# Altium PCB AC_board.PcbDoc (part 4 of 4)
Units mil, origin at the board's own origin, x right, y up, seen from the top; angles counter-clockwise.
Board outline 6299.21 x 4130.86 mil, 4 copper layers (Top Layer, Layer 1, Layer 2, Bottom Layer), stack 31.891 mil thick; 48 components, 40 nets, 187 pads, 6431 vias.
Unrouted connection lines stored in the file: 10.
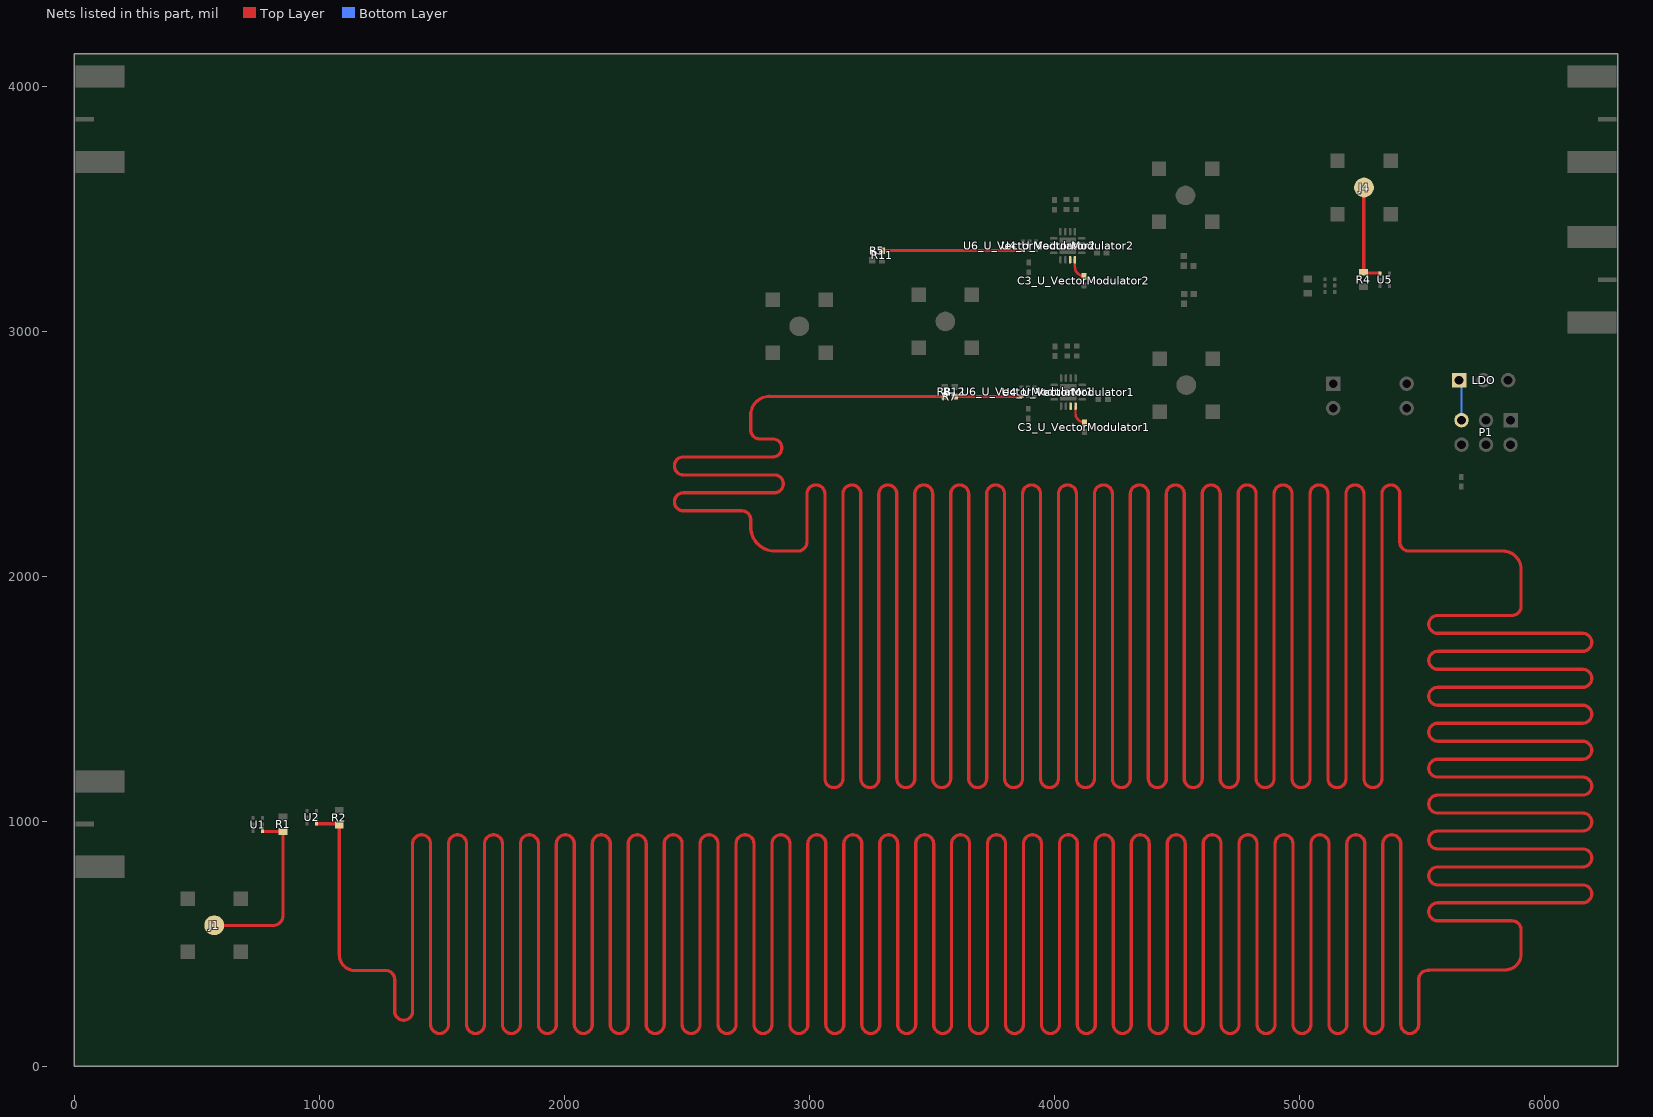
[diagram p6: the nets of this part, all layers, seen from the top]

## Via types
v1: diameter 12/12/12/12 (per signal layer), hole 10, Top Layer to Bottom Layer, 5510 vias
v2: diameter 14/14/14/14 (per signal layer), hole 12, Top Layer to Bottom Layer, 919 vias
v3: diameter 15/15/15/15 (per signal layer), hole 12, Top Layer to Bottom Layer, 2 vias

## Nets (pads, with @x,y where several pads share a name; then routed paths per layer and width w, separated by ;. In a path a pad name is that pad's centre, name@x,y a point inside that pad or via, vN(x,y) a via of type N, cw(c..) or ccw(c..) an arc to the next point about the centre after c; other vN are vias at no path point) (continued)
RF-S2-2: R2.2 R7.1 R8.1 U2.4 | length 107038.5
  Top Layer w0: R8.1@3548.49,2731.18 R8.1@3552.31,2735 ; R8.1@3549.18,2739.13 3552.5,2735.81 R8.1@3553,2735.32
  Top Layer w13.3: U2.4@989.88,992.92 1072.55,992.92 1082.29,983.18 1082.29,458.41 ccw(c1148.13,458.41) 1134.48,394 1135.96,394 1142.61,394 1271.4,394 cw(c1271.4,357.35) 1308.05,357.35 1308.05,227.31 ccw(c1344.7,227.31) 1381.36,227.31 1381.36,910.73 cw(c1418.01,910.73) 1454.66,910.73 1454.66,173.54 ccw(c1491.31,173.54) 1527.97,173.54 1527.97,910.73 cw(c1564.62,910.73) 1601.27,910.73 1601.27,173.54 ccw(c1637.92,173.54) 1674.58,173.54 1674.58,910.73 cw(c1711.23,910.73) 1747.88,910.73 1747.88,173.54 ccw(c1784.53,173.54) 1821.19,173.54 1821.19,910.73 cw(c1857.84,910.73) 1894.49,910.73 1894.49,173.54 ccw(c1931.14,173.54) 1967.8,173.54 1967.8,910.73 cw(c2004.45,910.73) 2041.1,910.73 2041.1,173.54 ccw(c2077.75,173.54) 2114.41,173.54 2114.41,910.73 cw(c2151.06,910.73) 2187.71,910.73 2187.71,173.54 ccw(c2224.36,173.54) 2261.02,173.54 2261.02,910.73 cw(c2297.67,910.73) 2334.32,910.73 2334.32,173.54 ccw(c2370.97,173.54) 2407.63,173.54 2407.63,910.73 cw(c2444.28,910.73) 2480.93,910.73 2480.93,173.54 ccw(c2517.58,173.54) 2554.24,173.54 2554.24,910.73 cw(c2590.89,910.73) 2627.54,910.73 2627.54,173.54 ccw(c2664.19,173.54) 2700.85,173.54 2700.85,910.73 cw(c2737.5,910.73) 2774.15,910.73 2774.15,173.54 ccw(c2810.8,173.54) 2847.46,173.54 2847.46,910.73 cw(c2884.11,910.73) 2920.76,910.73 2920.76,173.54 ccw(c2957.41,173.54) 2994.07,173.54 2994.07,910.73 cw(c3030.72,910.73) 3067.37,910.73 3067.37,173.54 ccw(c3104.02,173.54) 3140.68,173.54 3140.68,910.73 cw(c3177.33,910.73) 3213.98,910.73 3213.98,173.54 ccw(c3250.63,173.54) 3287.29,173.54 3287.29,910.73 cw(c3323.94,910.73) 3360.59,910.73 3360.59,173.54 ccw(c3397.24,173.54) 3433.9,173.54 3433.9,910.73 cw(c3470.55,910.73) 3507.2,910.73 3507.2,173.54 ccw(c3543.85,173.54) 3580.51,173.54 3580.51,910.73 cw(c3617.16,910.73) 3653.81,910.73 3653.81,173.54 ccw(c3690.46,173.54) 3727.12,173.54 3727.12,910.73 cw(c3763.77,910.73) 3800.42,910.73 3800.42,173.54 ccw(c3837.07,173.54) 3873.73,173.54 3873.73,910.73 cw(c3910.38,910.73) 3947.03,910.73 3947.03,173.54 ccw(c3983.68,173.54) 4020.34,173.54 4020.34,910.73 cw(c4056.99,910.73) 4093.64,910.73 4093.64,173.54 ccw(c4130.29,173.54) 4166.95,173.54 4166.95,910.73 cw(c4203.6,910.73) 4240.25,910.73 4240.25,173.54 ccw(c4276.9,173.54) 4313.56,173.54 4313.56,910.73 cw(c4350.21,910.73) 4386.86,910.73 4386.86,173.54 ccw(c4423.51,173.54) 4460.17,173.54 4460.17,910.73 cw(c4496.82,910.73) 4533.47,910.73 4533.47,173.54 ccw(c4570.12,173.54) 4606.78,173.54 4606.78,910.73 cw(c4643.43,910.73) 4680.08,910.73 4680.08,173.54 ccw(c4716.73,173.54) 4753.39,173.54 4753.39,910.73 cw(c4790.04,910.73) 4826.69,910.73 4826.69,173.54 ccw(c4863.34,173.54) 4900,173.54 4900,910.73 cw(c4936.65,910.73) 4973.3,910.73 4973.3,173.54 ccw(c5009.95,173.54) 5046.61,173.54 5046.61,910.73 cw(c5083.26,910.73) 5119.91,910.73 5119.91,173.54 ccw(c5156.56,173.54) 5193.22,173.54 5193.22,910.73 cw(c5229.87,910.73) 5266.52,910.73 5266.52,173.54 ccw(c5303.17,173.54) 5339.83,173.54 5339.83,910.73 cw(c5376.48,910.73) 5413.13,910.73 5413.13,173.54 ccw(c5449.78,173.54) 5486.44,173.54 5486.44,357.35 cw(c5523.09,357.35) 5523.09,394 ; R8.1@3552.5,2735.81 2845.51,2735.81 ccw(c2837.57,2659.51) 2761.81,2671.57 ccw(c2837.57,2659.51) 2761.21,2666.96 ccw(c2837.57,2659.51) 2761.04,2664.92 2761,2664.28 2761,2599.09 ccw(c2797.65,2599.09) 2797.65,2562.44 2851.24,2562.44 cw(c2851.24,2525.79) 2851.24,2489.14 2485.99,2489.14 ccw(c2485.99,2452.48) 2485.99,2415.83 2857.36,2415.83 cw(c2857.36,2379.18) 2857.36,2342.53 2485.99,2342.53 ccw(c2485.99,2305.87) 2485.99,2269.22 2724.35,2269.22 cw(c2724.35,2232.57) 2761,2232.57 2761,2225.91 2761,2203 ccw(c2859,2203) 2761.43,2193.85 ccw(c2859,2203) 2791.3,2132.15 ccw(c2859,2203) 2859,2105 2947,2105 2953.65,2105 ccw(c2953.65,2141.65) 2990.31,2141.65 2990.31,2338.19 cw(c3026.96,2338.19) 3063.61,2338.19 3063.61,1176.4 ccw(c3100.26,1176.4) 3136.92,1176.4 3136.92,2338.19 cw(c3173.57,2338.19) 3210.22,2338.19 3210.22,1176.4 ccw(c3246.87,1176.4) 3283.53,1176.4 3283.53,2338.19 cw(c3320.18,2338.19) 3356.83,2338.19 3356.83,1176.4 ccw(c3393.48,1176.4) 3430.14,1176.4 3430.14,2338.19 cw(c3466.79,2338.19) 3503.44,2338.19 3503.44,1176.4 ccw(c3540.09,1176.4) 3576.75,1176.4 3576.75,2338.19 cw(c3613.4,2338.19) 3650.05,2338.19 3650.05,1176.4 ccw(c3686.7,1176.4) 3723.36,1176.4 3723.36,2338.19 cw(c3760.01,2338.19) 3796.66,2338.19 3796.66,1176.4 ccw(c3833.31,1176.4) 3869.97,1176.4 3869.97,2338.19 cw(c3906.62,2338.19) 3943.27,2338.19 3943.27,1176.4 ccw(c3979.92,1176.4) 4016.58,1176.4 4016.58,2338.19 cw(c4053.23,2338.19) 4089.88,2338.19 4089.88,1176.4 ccw(c4126.53,1176.4) 4163.19,1176.4 4163.19,2338.19 cw(c4199.84,2338.19) 4236.49,2338.19 4236.49,1176.4 ccw(c4273.14,1176.4) 4309.8,1176.4 4309.8,2338.19 cw(c4346.45,2338.19) 4383.1,2338.19 4383.1,1176.4 ccw(c4419.75,1176.4) 4456.41,1176.4 4456.41,2338.19 cw(c4493.06,2338.19) 4529.71,2338.19 4529.71,1176.4 ccw(c4566.36,1176.4) 4603.02,1176.4 4603.02,2338.19 cw(c4639.67,2338.19) 4676.32,2338.19 4676.32,1176.4 ccw(c4712.97,1176.4) 4749.63,1176.4 4749.63,2338.19 cw(c4786.28,2338.19) 4822.93,2338.19 4822.93,1176.4 ccw(c4859.58,1176.4) 4896.24,1176.4 4896.24,2338.19 cw(c4932.89,2338.19) 4969.54,2338.19 4969.54,1176.4 ccw(c5006.19,1176.4) 5042.85,1176.4 5042.85,2338.19 cw(c5079.5,2338.19) 5116.15,2338.19 5116.15,1176.4 ccw(c5152.8,1176.4) 5189.46,1176.4 5189.46,2338.19 cw(c5226.11,2338.19) 5262.76,2338.19 5262.76,1176.4 ccw(c5299.41,1176.4) 5336.07,1176.4 5336.07,2338.19 cw(c5372.72,2338.19) 5409.37,2338.19 5409.37,2141.65 ccw(c5446.02,2141.65) 5446.02,2105 5558.74,2105 5830,2105 cw(c5830,2031) 5904,2031 5904,1990.67 5904,1879.14 cw(c5867.35,1879.14) 5867.35,1842.49 5564.18,1842.49 ccw(c5564.18,1805.84) 5564.18,1769.19 6155.62,1769.19 cw(c6155.62,1732.53) 6155.62,1695.88 5563.88,1695.88 ccw(c5563.88,1659.23) 5563.88,1622.58 6155.62,1622.58 cw(c6155.62,1585.92) 6155.62,1549.27 5563.88,1549.27 ccw(c5563.88,1512.62) 5563.88,1475.97 6155.62,1475.97 cw(c6155.62,1439.31) 6155.62,1402.66 5563.88,1402.66 ccw(c5563.88,1366.01) 5563.88,1329.36 6155.62,1329.36 cw(c6155.62,1292.7) 6155.62,1256.05 5563.88,1256.05 ccw(c5563.88,1219.4) 5563.88,1182.75 6155.62,1182.75 cw(c6155.62,1146.09) 6155.62,1109.44 5563.88,1109.44 ccw(c5563.88,1072.79) 5563.88,1036.14 6155.62,1036.14 cw(c6155.62,999.48) 6155.62,962.83 5563.88,962.83 ccw(c5563.88,926.18) 5563.88,889.53 6155.62,889.53 cw(c6155.62,852.87) 6155.62,816.22 5563.88,816.22 ccw(c5563.88,779.57) 5563.88,742.92 6155.62,742.92 cw(c6155.62,706.26) 6155.62,669.61 5563.88,669.61 ccw(c5563.88,632.96) 5563.88,596.31 5867.35,596.31 cw(c5867.35,559.65) 5904,559.65 5904,553 5904,460.79 cw(c5839.21,460.79) 5839.31,396 5525.09,396 5523.09,394 ; 5529.74,394 5523.09,394
RF-S3-1: R5.2 R11.2 U6_U_VectorModulator2.1 | length 570
  Top Layer w13.3: R11.2@3296.65,3330.86 U6_U_VectorModulator2.1@3866.66,3330.86
RF-S3-2: R7.2 R12.2 U6_U_VectorModulator1.1 | length 267.2
  Top Layer w13.3: R12.2@3593.31,2735 R12.2@3593,2735.31 U6_U_VectorModulator1.1@3859.77,2735.31
RXin: J4.C R4.1 U5.4 | length 416.6
  Top Layer w13.3: J4.C@5263.3,3588.31 5262.26,3587.26 5262.26,3243.57 R4.1@5261.22,3242.53 5264.35,3239.4 5328.36,3239.4 5328.51,3239.25 U5.4@5328.51,3237.98
TXout: J1.C R1.1 U1.4 | length 731.1
  Top Layer w13.3: J1.C@572,578 573,577 811,577 ccw(c811,618.51) 852.51,618.51 R1.1@852.51,960.47 772.92,960.47 770.38,963.02 U1.4@769,963.02
VCC: LDO.1 P1.5 | length 167.1
  Bottom Layer w10: LDO.1@5651,2802 5661,2792 P1.5@5661,2639
VCC-IN1_U_VectorModulator1: C3_U_VectorModulator1.2 U4_U_VectorModulator1.7 U4_U_VectorModulator1.8 | length 97.1
  Top Layer w10: U4_U_VectorModulator1.7@4066.39,2686.39 U4_U_VectorModulator1.7@4066.39,2696.39 ; U4_U_VectorModulator1.8@4086.07,2696.39 4086.07,2666.71 ccw(c4122.65,2666.71) C3_U_VectorModulator1.2@4122.65,2630.13
VCC-IN1_U_VectorModulator2: C3_U_VectorModulator2.2 U4_U_VectorModulator2.7 U4_U_VectorModulator2.8 | length 97.1
  Top Layer w10: U4_U_VectorModulator2.7@4064.06,3283.63 U4_U_VectorModulator2.7@4064.06,3293.63 ; U4_U_VectorModulator2.8@4083.74,3293.63 4083.74,3263.94 ccw(c4120.31,3263.94) C3_U_VectorModulator2.2@4120.31,3227.37
pads on no net: U4_U_VectorModulator1.1 U4_U_VectorModulator1.4 U4_U_VectorModulator1.10 U4_U_VectorModulator1.11 U4_U_VectorModulator1.12 U4_U_VectorModulator1.15 U4_U_VectorModulator1.16 U4_U_VectorModulator2.1 U4_U_VectorModulator2.4 U4_U_VectorModulator2.10 U4_U_VectorModulator2.11 U4_U_VectorModulator2.12 U4_U_VectorModulator2.15 U4_U_VectorModulator2.16 U6_U_VectorModulator1.6 U6_U_VectorModulator2.6

## Polygon pours and split planes (outlines as drawn)
AGND on Bottom Layer "GND-4" (solid, pour order 8): 0,4133.86 6299.21,4133.86 6299.21,3 0,3
AGND on Layer 2 "GND-3" (solid, pour order 6): 0,4133.86 6299.21,4133.86 6299.21,3 0,3
AGND on Layer 1 "GND-2" (solid, pour order 4): 0,4133.86 6299.21,4133.86 6299.21,3 0,3
AGND on Top Layer "GND-1" (solid, pour order 2): 0,4133.86 6299.21,4133.86 6299.21,3 0,3

## Silkscreen, mask and mechanical layers (free items; w line width, h text height)
Top Overlay:
  text "CPWG [20mils Iso] 13.305 mils" at 2434,3924.01 h40
  text "WCSNG" at 2841,3664 h78.74
  text "AC board / Rev 3" at 2583.5,3449.02 h40
  text "8 ns (56668.82 mils)" at 630,2662.56 h40
  text "15 ns (107038.5mils)" at 4127.16,991.34 h40
Top Solder:
  lines w0: 4213.74,3321.74 4213,3321 4214.97,3321 ; 4520.31,3265.31 4523.17,3268.17
  lines w10: 3917.37,2733.79 cw(c3927.42,2733.79) 3927.42,2743.83 3999.26,2743.83 ; 3917.37,2772.76 ccw(c3926.62,2772.76) 3926.62,2763.52 3999.26,2763.52 ; 3924.3,3331.51 cw(c3947.38,3308.43) 3947.38,3341.07 3996.93,3341.07 ; 3924.3,3370.49 ccw(c3947.8,3393.98) 3947.8,3360.76 3996.93,3360.76
  lines w13.3: 43.5,991 730.02,991 ; 43.5,3866.99 6255.71,3866.99 ; 411.9,2097 411.9,2065.1 ccw(c476,2065.1) 476,2001 566.42,2001 ; 411.95,3150.81 411.95,3246.81 ; 412,3247 cw(c488.62,3247) 488.62,3323.62 579.24,3323.62 ; 573,577 811,577 ccw(c811,618.51) 852.51,618.51 852.51,960.47 772.92,960.47 ; 769.1,1015.08 848.07,1015.08 ; 852.51,1019.53 948.89,1019.53 ; 989.88,992.92 1072.55,992.92 ; 989.88,1045.08 1080.55,1045.08 ; 1082.07,1046.6 1082.07,1184.35 cw(c1150,1163.59) 1150,1234.62 1280.15,1234.66 ; 1082.29,983.18 1082.29,458.41 ccw(c1148.13,458.41) 1134.48,394 ; 2310.31,2001 2400,2001 cw(c2401.3,1936.59) 2465.72,1936.59 2465.72,1281.29 cw(c2419.35,1281.29) 2422,1235 ; 2761,2203 2761,2225.91 ; 2761.43,2193.85 ccw(c2859,2203) 2791.3,2132.15 ccw(c2859,2203) 2859,2105 2947,2105 ; 2761.81,2671.57 cw(c2837.57,2659.51) 2845.51,2735.81 3552.5,2735.81 ; 2761.86,3323.62 3243.07,3323.62 ; 2959.33,3022.33 3199.48,3022.33 ccw(c3198.49,3083.03) 3259.19,3083.43 ; 3243.2,3323.62 3244.27,3324.68 ; 3251,3324.68 3257.14,3330.83 ; 3256.39,3290.46 cw(c-38712.17,2607.91) 3258.82,3119.68 cw(c-5625.95,3011.36) 3259.19,3083.52 ; 3257,3290.31 3299.48,3290.31 ; 3296.65,3330.86 3866.66,3330.86 ; 3554.74,2779.6 3554.74,3002.74 ; 3556.98,2774.86 3592.83,2774.86 ; 3593,2735.31 3859.77,2735.31 ; 4111.5,3321.39 4172.7,3321.39 ; 4113.88,2724.1 4178.25,2724.1 ; 4212.82,3281.61 ccw(c4229.3,3281.61) 4229.3,3265.12 4520.31,3265.12 ; 4213,3281.61 4213,3321 ; 4218.51,2723.2 4218,2723.72 4218,3105 cw(c4266.68,3105) 4266.68,3153.68 4529,3153.68 ; 4528,3308.86 4535,3315.86 4535,3556.02 ; 4533.5,2786.5 4533.5,3109.81 ; 4567.69,3268.17 4567.88,3267.98 5004.02,3267.98 cw(c5004.02,3241) 5031,3241 5031,3217.53 5033.77,3214.76 5104.36,3214.76 5104.51,3214.6 5104.51,3213.98 ; 4569.92,3155.24 5031.76,3155.24 ; 5037.12,3160.6 5104.36,3160.6 ; 5143.28,3187.88 5256.48,3187.88 ; 5262.26,3243.57 5262.26,3587.26 ; 5263.67,3185.92 5328.41,3185.92 ; 5264.35,3239.4 5328.36,3239.4 ; 5367.49,3212 6255.71,3212 ; 5525.09,396 5839.31,396 ccw(c5839.21,460.79) 5904,460.79 5904,553 ; 5558.74,2105 5830,2105 cw(c5830,2031) 5904,2031 5904,1990.67 ; 4535,3556.02 4535,3556.02
Board Outline:
  lines w10: 0,0 0,1170.25 0,2928.76 0,4133.86 6299.21,4133.86 6299.21,0 0,0

## Text inside footprints (layer, text, board x,y; h text height)
P1: Top Overlay "6" at 5601,2559 h50 r180; Top Overlay "5" at 5601,2659 h50 r180; Top Overlay "2" at 5961,2559 h50 r180; Top Overlay "1" at 5941,2659 h50 r180